# Altium PCB PCB1.PcbDoc
Units mil, origin at the board's own origin, x right, y up, seen from the top; angles counter-clockwise.
Board outline 5050 x 1500 mil, 2 copper layers (Top Layer, Bottom Layer); 21 components, 31 nets, 60 pads, 0 vias.
Unrouted connection lines stored in the file: 16.
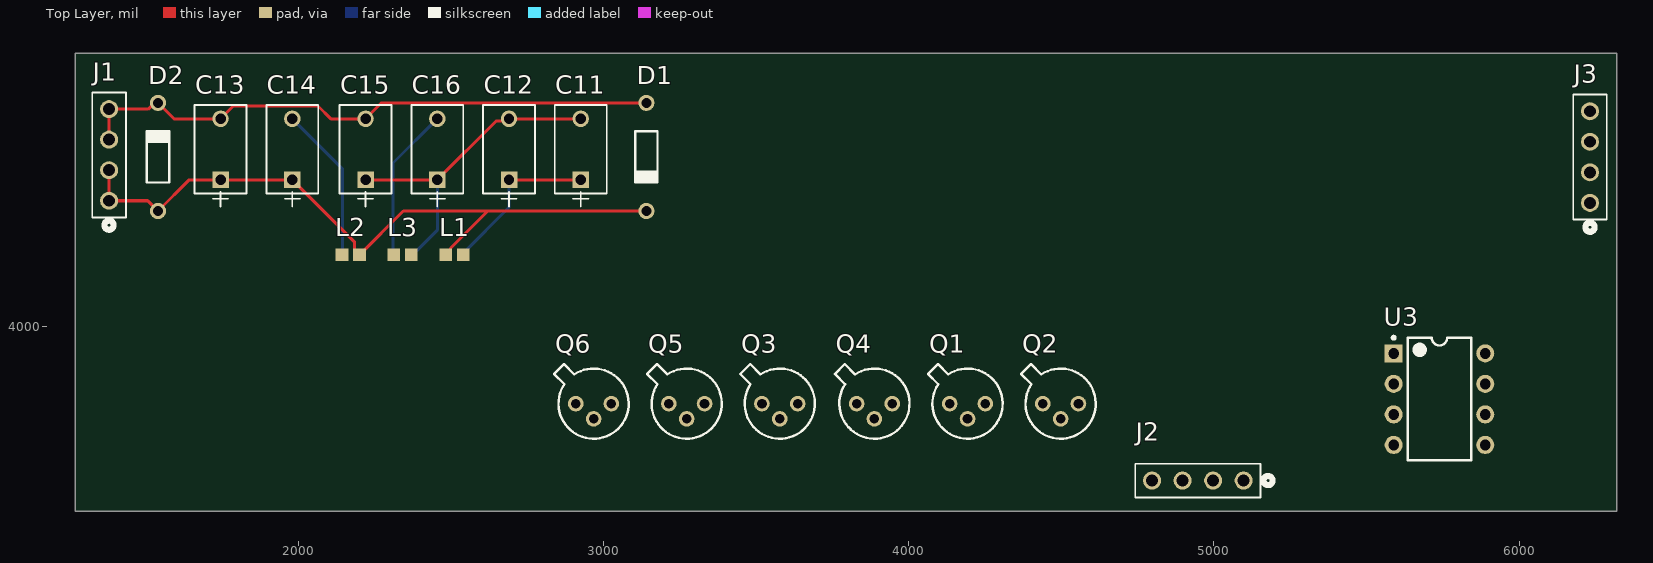
[diagram p0: Top Layer view]
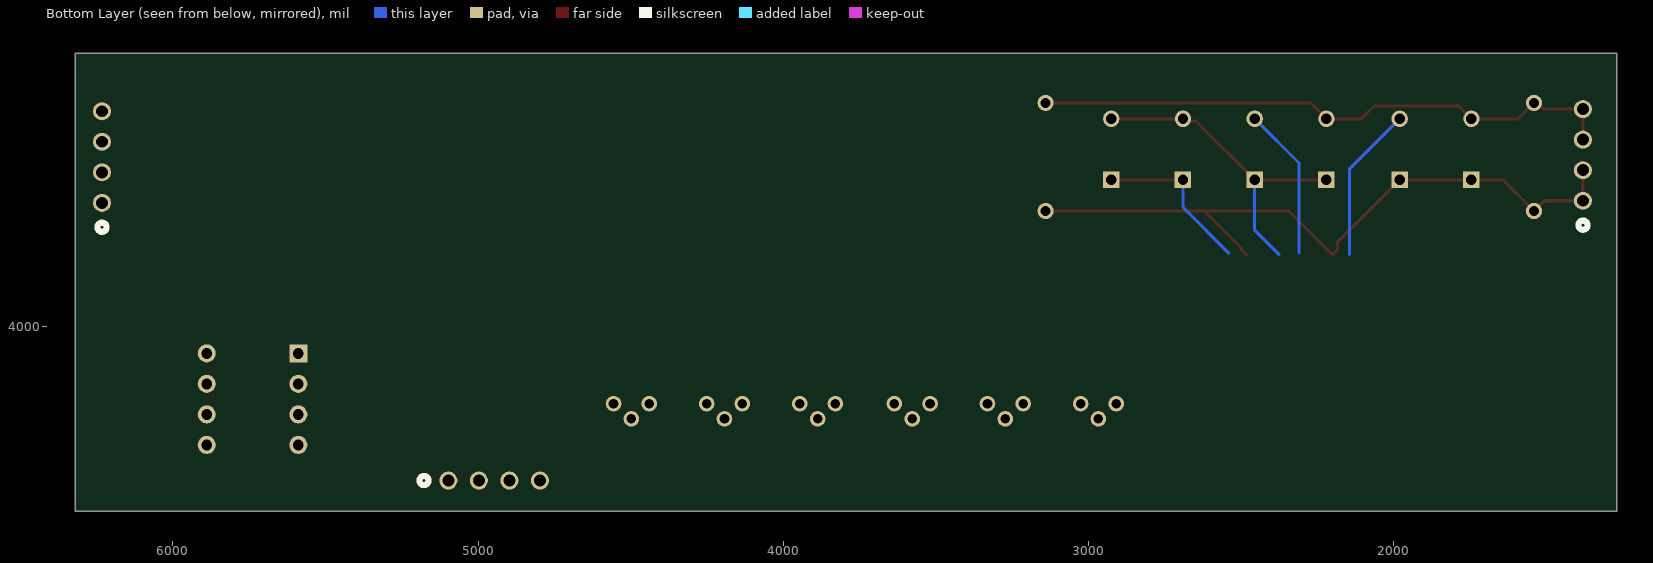
[diagram p1: Bottom Layer view, seen from below]

## Layer stack, top to bottom
Top Solder: solder mask 0.4, Solder Resist, Dk 3.5
Top Layer: signal copper 1.4
Dielectric 1: dielectric 12.6, FR-4, Dk 4.8
Bottom Layer: signal copper 1.4
Bottom Solder: solder mask 0.4, Solder Resist, Dk 3.5

## Board outline
1270,3395 1270,4895 6320,4895 6320,3395

## Design rules (kind name [scope] priority, off if disabled: settings)
Clearance [All] p1: gap=10 ignorepadtopadclearanceinfootprint=FALSE
PolygonConnect [All] p1: connectstyle=Relief reliefconductorwidth=10 reliefentries=4 polygonreliefangle="90 Angle" airgapwidth=10
RoutingVias [All] p1: holewidth=28 width=50 viastyle="Through Hole" minholewidth=28 minwidth=50 maxholewidth=28 maxwidth=50
SolderMaskExpansion [All] p1: expansion=4 istentingtop=FALSE
SupplyNets "Schematic Supply Nets" [InNet('GND')] p1: voltage=0.000
Width [All] p1: maxlimit=10 minlimit=10 preferedwidth=10
30 further rules are at their usual default settings.

## Classes and differential pairs
component class mahirAMPLIFER: C7 C8 C9 C10 J3 R22 R23 R24 R25 R26 R27 R28 R29 Rg1 Rg2 Rg3 Rg4 Rs1 Rs2

## Components (designator, comment, footprint, x,y, rotation, side; value= is the part's Value field where it differs from the comment)
C11 "C330C105K5R5TA7301" CAP_C330C_MR_X7R_KEM 2926.14,4480.24 r90 top
C12 "C330C105K5R5TA7301" CAP_C330C_MR_X7R_KEM 2691.14,4480.24 r90 top
C13 "C330C105K5R5TA7301" CAP_C330C_MR_X7R_KEM 1746.14,4480.24 r90 top
C14 "C330C105K5R5TA7301" CAP_C330C_MR_X7R_KEM 1981.14,4480.24 r90 top
C15 "C330C105K5R5TA7301" CAP_C330C_MR_X7R_KEM 2221.14,4480.24 r90 top
C16 "C330C105K5R5TA7301" CAP_C330C_MR_X7R_KEM 2456.14,4480.24 r90 top
D1 "1N4148" NXP-SOD27-2_V 3141.14,4555.24 r270 top
D2 "1N4148" NXP-SOD27-2_V 1541.14,4555.24 r90 top
J1 "PRPC004SAAN-RC" CONN4_PRPC004_SUL 1380.91,4411.81 r270 top
J2 "PRPC004SAAN-RC" CONN4_PRPC004_SUL 5097.64,3495.08 r0 top
J3 "PRPC004SAAN-RC" CONN4_PRPC004_SUL 6232.28,4404.92 r270 top
L1 "BRC1608TR50M6" INDC1608X100N 2512.48,4235.24 r0 top
L2 "BRC1608TR50M6" INDC1608X100N 2172.48,4235.24 r0 top
L3 "BRC1608TR50M6" INDC1608X100N 2342.48,4235.24 r0 top
Q1 "2N2222" MLTC-TO-18-3 4193.11,3747.05 r0 top
Q2 "2N2222" MLTC-TO-18-3 4498.11,3747.05 r0 top
Q3 "2N2222" MLTC-TO-18-3 3578.11,3747.05 r0 top
Q4 "2N2222" MLTC-TO-18-3 3888.11,3747.05 r0 top
Q5 "2N2222" MLTC-TO-18-3 3273.11,3747.05 r0 top
Q6 "2N2222" MLTC-TO-18-3 2968.11,3747.05 r0 top
U3 "LT1638CN8#PBF" LT-N8-8 5739.17,3761.81 r0 top

## Footprints (in the part's own frame and the unit in brackets; to place one, negate y for a bottom-side part, rotate by r counter-clockwise, add the part's x,y. Pads: shape width x height; smd on the part's side, far side on the other; paste and mask are expansions set on the pad)
CAP_C330C_MR_X7R_KEM [mil]
  rect 54x54 / inner round 60 / far side rect 54x54 hole 34 paste-99999 mask+0: 1(0,0)
  round 54 / inner round 60 / far side round 54 hole 34 paste-99999 mask+0: 2(200,0)
  silkscreen extent -87,-85 245,85
CONN4_PRPC004_SUL [mil]
  round 59 / inner round 60 / far side round 59 hole 39 paste-99999 mask+0: 1(0,0) 2(-100,0) 3(-200,0) 4(-300,0)
  silkscreen extent -355,-55 95,55
INDC1608X100N [mm]
  rect 1.06x1.02 smd: 1(-0.728,0) 2(0.728,0)
LT-N8-8 [mm] "DIP, 8-Leads, Body 10.16x6.48mm, Pitch 2.54mm"
  rect 1.5x1.5 hole 0.9: 1(-3.81,3.81)
  round 1.5 hole 0.9: 2(-3.81,1.27) 3(-3.81,-1.27) 4(-3.81,-3.81) 5(3.81,-3.81) 6(3.81,-1.27) 7(3.81,1.27) 8(3.81,3.81)
  silkscreen extent -3.93,-5.1 2.65,5.23, body extent -3.95,-5.07 3.95,5.07, height 3.94
MLTC-TO-18-3 [mm] "TO-18, 3-Leads"
  round 1.3 hole 0.8: 1(-1.485,0) 2(0,-1.27) 3(1.485,0)
  silkscreen extent -3.29,-2.92 2.92,3.29, body extent -3.29,-2.93 2.93,3.29, height 5.33
NXP-SOD27-2_V [mm] "SOD27, 2-Leads, Dia 1.85mm, Body Length 4.25mm, Pin Spacing 9mm"
  round 1.35 hole 0.85: 1(-4.5,0) 2(4.5,0)
  silkscreen extent -2.12,-0.92 2.13,0.93, body extent -4.78,-0.92 4.78,0.92, height 1.84

## Part data
C11 C12 C13 C14 C15 C16: "No Description Available", Mfr_Name=Kemet
D1 D2: library part CMP-0648-00002-1, "High-speed Diode, 100 V, 450 mA, 2-Pin SOD27, RoHS", Manufacturer="NXP Semiconductors", Cd="4 pF Max.", ComponentLink1Description="Manufacturer URL", ComponentLink1URL=http://www.nxp.com/, ComponentLink2Description=Datasheet, ComponentLink2URL=http://www.nxp.com/documents/data_sheet/1N4148_1N4448.pdf, ComponentLink3Description="Package Specification", ComponentLink3URL=http://www.nxp.com/documents/data_sheet/1N4148_1N4448.pdf, Configuration=Single, DatasheetVersion=Aug-04, IF="200 mA Max.", IFRM="450 mA", IFSM="4 A Max.", IR (VR="20 V)=25 nA", Mounting Technology="Through Hole", PackageDescription="2-Pin Hermetically Sealed Glass Package, Axial Leaded, Dia 1.85 mm, Body Length 4.25 mm, Lead Spread 25.4 mm", PackageReference=SOD27, PackageVersion=Aug-04, PartNumber=1N4148, RoHS=TRUE, Trr="4 ns Max.", VF (IF="10 mA)=1 V", VR="100 V Max."
J1 J2 J3: "No Description Available", Mfr_Name=Sullins, RefDes=RefDes, Type="Headers, Male Pins"
L1 L2 L3: "Inductor Power Chip Wirewound 500nH 20% 6MHz Ferrite 1.05A 117mOhm DCR 0603 T/R", Package=None, Availability=Unavailable, MP=BRC1608TR50M6, Price=None
Q1 Q2 Q3 Q4 Q5 Q6: library part CMP-2000-05237-1, "Low Power Bipolar NPN Transistor, 30 V, -65 to 200 degC, 3-Pin TO-18, RoHS, Bulk", Collector Emitter Voltage V(br)ceo=30V, Collector Emitter Voltage Vces=400mV, Continuous Collector Current Ic Max=800mA, Current Ic @ Vce Sat=150mA, DC Current Gain hFE=100, Full Power Rating Temperature=25degC, Manufacturer=Multicomp, Package / Case=TO-18, Package Description="3-Pin Transistor Outline Package (TO-18), Dia 5.54 mm, Pitch Pitch 1.485mm", Package Reference=TO-18-3, Power Dissipation Pd=500mW, Voltage Vcbo=60V, Current Ic Continuous a Max=800mA, Current Ic hFE=150mA, Datasheet URL=http://www.farnell.com/datasheets/1662272.pdf, Datasheet Version="Rev. 1.1, 05/2012", DC Collector Current=800mA, Gain Bandwidth ft Min=250MHz, Gain Bandwidth ft Typ=250MHz, Hfe Min=100, Manufacturer URL=http://uk.farnell.com/b/multicomp, No. of Pins=3, No. of Transistors=1, Pin Configuration=a, Power Dissipation Ptot Max=500mW, SVHC=NoSVHC(19-Dec-2012), Transistor Case Style=TO-18, Transistor Polarity=NPN
U3: library part CMP-0359-01111-2, "Dual Channel, High Voltage, Micropower Rail-to-Rail Operational Amplifier, 1.2 MHz Typical GBW, 0.38 V/us Typical SR, 2.2 to 44 V, 8-Pin DIP (N8-8), Commercial, Pb-Free", Linear Technology Part Number=LT1638, Manufacturer="Linear Technology", Channels (#)=2, ComponentLink1Description="Manufacturer URL", ComponentLink1URL=http://www.linear.com/, ComponentLink2Description=Datasheet, ComponentLink2URL=http://cds.linear.com/docs/en/datasheet/16389fg.pdf, ComponentLink3Description="Package Specification", ComponentLink3URL=http://cds.linear.com/docs/en/packaging/05081510_I_N8.pdf, DatasheetVersion="Rev. G", GBW (MHz) Typical=1.2, Is (mA) Typical=0.17, Mounting Technology="Surface Mount", PackageDescription="8-Lead PDIP, Body 10.16 x 6.48 mm, Pitch 2.54 mm", PackageReference=LT-N8-8, PackageVersion="Rev I", PartNumber=LT1638CN8#PBF, RevisionNote="URLs updated", RoHS=Pb-Free, SR (V/us) Typical=0.38, Type=VFB, Vos (mV) Guaranteed=0.6, Vos (mV) Typical=0.2, Vs Max (V)=44, Vs Min (V)=2.2

## Nets (pads, with @x,y where several pads share a name; then routed paths per layer and width w, separated by ;. In a path a pad name is that pad's centre, name@x,y a point inside that pad or via, vN(x,y) a via of type N, cw(c..) or ccw(c..) an arc to the next point about the centre after c; other vN are vias at no path point)
5V: J3.2 U3.8
GND: C13.2 C15.2 D1.1 D2.2 J1.3 J1.4 J3.4 U3.4 | length 1946.8
  Top Layer w10: J1.3 J1.4 1508.87,4711.81 1529.47,4732.4 D2.2 1593.31,4680.24 C13.2 1788.14,4722.24 2065.49,4722.24 2107.49,4680.24 C15.2 2273.31,4732.4 D1.1
I_Signal: J3.1
IF1_Signal: Q3.3 Q4.3
IF2_Signal: Q1.3 Q2.3
LimitertoBandpass: C13.1 C14.1 D1.2 D2.1 J1.1 J1.2 L1.1 L2.2 | length 2292.7
  Top Layer w10: J1.2 J1.1 1507.4,4411.81 D2.1 1643.31,4480.24 C13.1 C14.1 2185.28,4276.1 2185.28,4250.31 2200.35,4235.24 L2.2 2201.93,4235.24 2344.76,4378.07 2621.82,4378.07 ; L1.1 2484.61,4235.24 2499.69,4250.31 2499.69,4255.94 2621.82,4378.07 ; D1.2 2621.82,4378.07
LimitertoGilbert: C11.2 C12.2 C15.1 C16.1 L3.2 | length 1066
  Top Layer w10: C15.1 C16.1 2649.14,4673.24 2684.14,4673.24 C12.2 C11.2
  Bottom Layer w10: 2376.14,4235.24 2456.14,4315.24 C16.1
Low_Pass_0Deg: U3.3
Low_Pass_90Deg: U3.5
MixertoAmplifer_I: 
MixertoAmplifer_Q: 
NetC1_1: 
NetC3_1: 
NetC5_2: U3.1
NetC6_1: 
NetC7_2: U3.7
NetC8_1: 
NetC11_1: C11.1 C12.1 L1.2 | length 537.1
  Top Layer w10: C12.1 C11.1
  Bottom Layer w10: 2541.14,4240.24 2691.14,4390.24 C12.1
NetC14_2: C14.2 L2.1 | length 513.3
  Bottom Layer w10: C14.2 2146.14,4515.24 2146.14,4235.24
NetC16_2: C16.2 L3.1 | length 500.1
  Bottom Layer w10: 2311.14,4240.24 2311.14,4535.24 C16.2
NetI1_1: Q5.1 Q6.1
NetLO_signal1_1: Q2.2 Q3.2
NetLO_signal1_2: Q1.2 Q4.2
NetQ1_1: Q1.1 Q3.1 Q6.3
NetQ2_1: Q2.1 Q4.1 Q5.3
NetQ5_2: Q5.2
NetQ6_2: Q6.2
NetR1_2: 
NetRg1_1: U3.2
NetRg3_1: U3.6
Q_Signal: J3.3
pads on no net: J2.1 J2.2 J2.3 J2.4

## Silkscreen, mask and mechanical layers (free items; w line width, h text height)
Mechanical 1:
  the board outline again, w10